# Altium PCB WCH-CH9160-R0-1v0.PcbDoc
Units mil, origin at the board's own origin, x right, y up, seen from the top; angles counter-clockwise.
Board outline 787.4 x 1968.5 mil, 2 copper layers (Top Layer, Bottom Layer); 22 components, 26 nets, 95 pads, 182 vias.
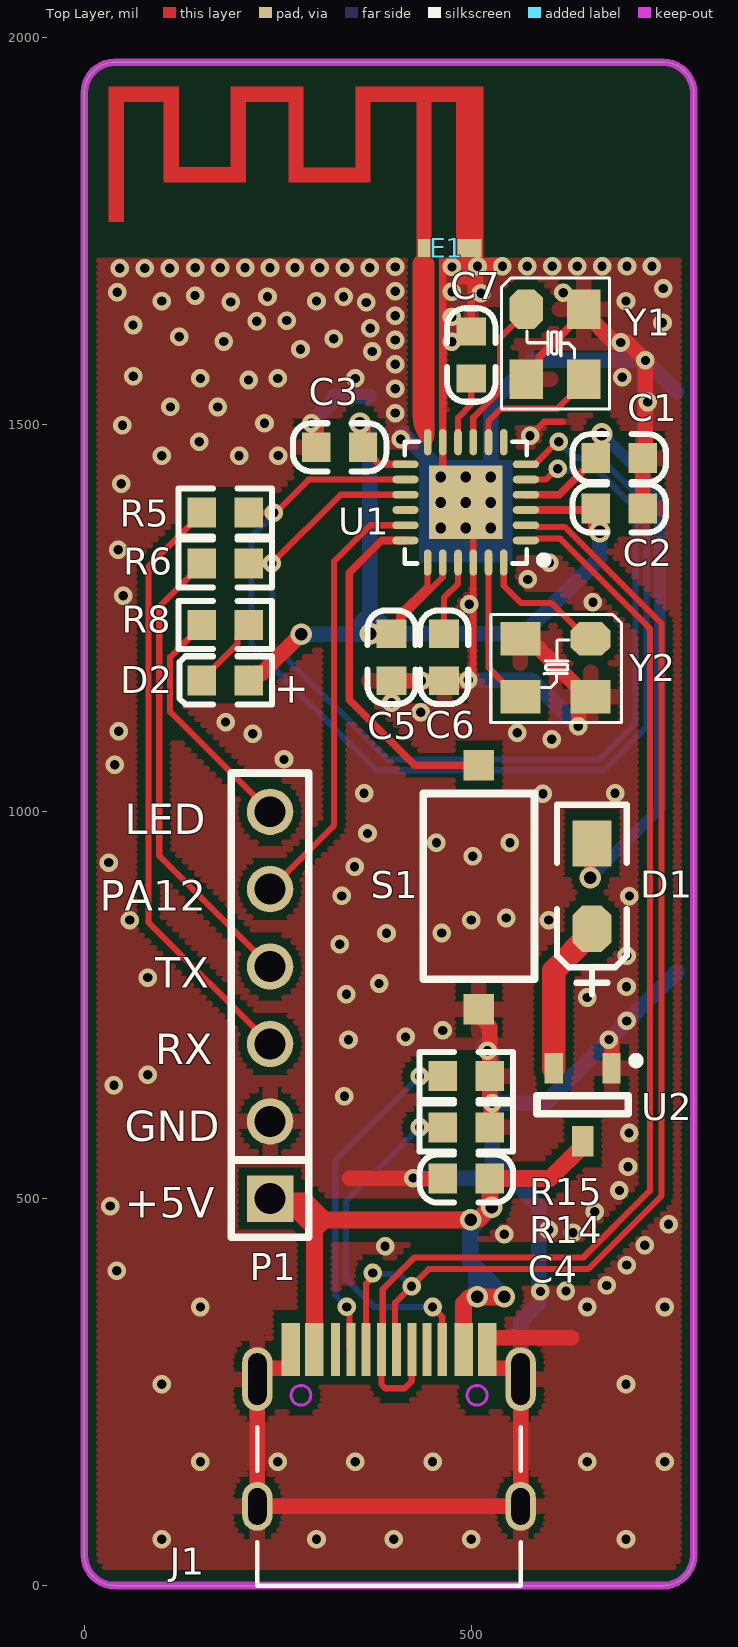
[diagram p0: Top Layer view]
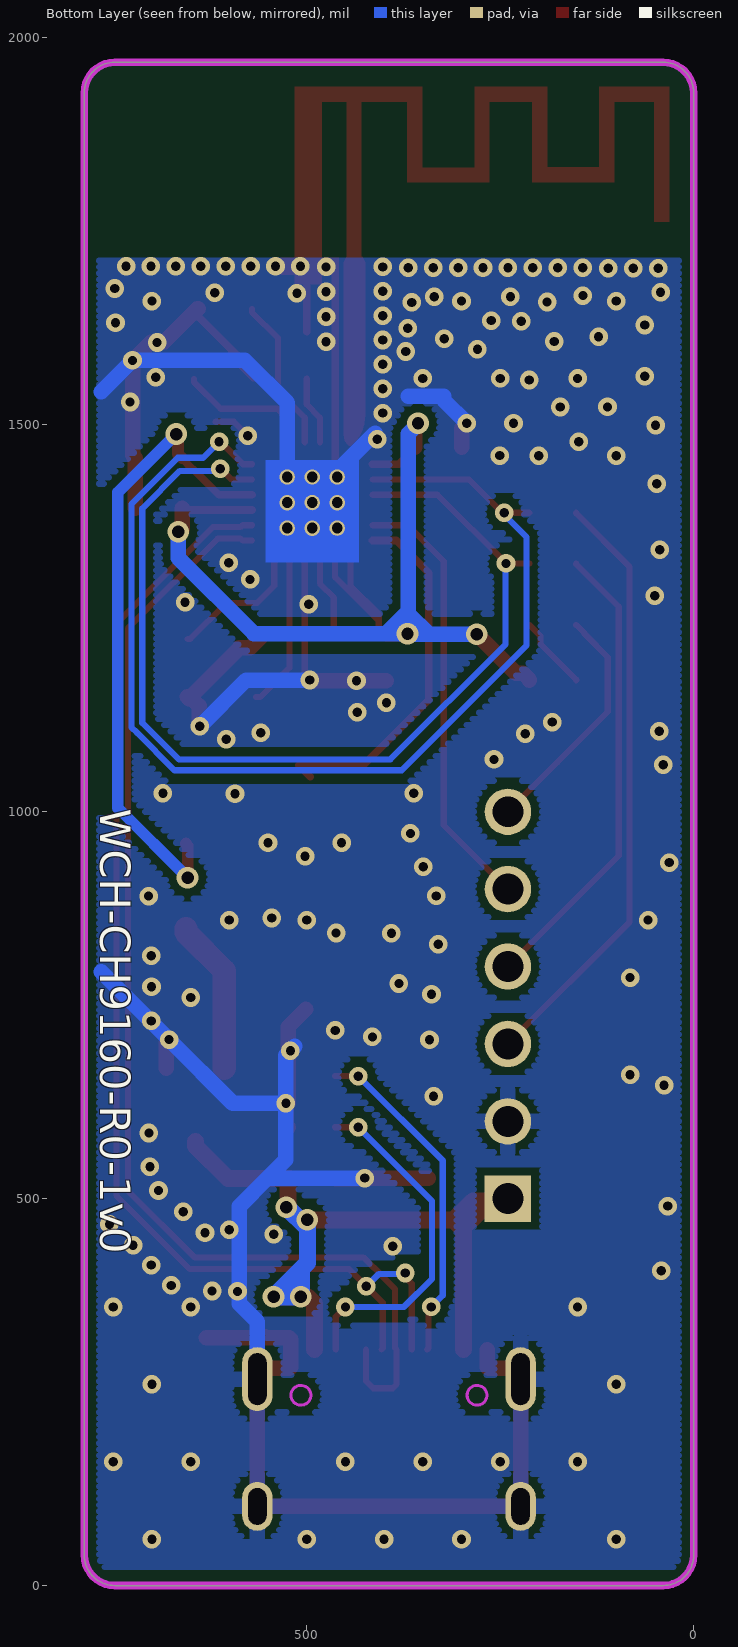
[diagram p1: Bottom Layer view, seen from below]

## Layer stack, top to bottom
Top Solder: solder mask 0.4, Solder Resist, Dk 3.5
Top Layer: signal copper 1.4
Dielectric 1: dielectric 12.6, FR-4, Dk 4.8
Bottom Layer: signal copper 1.4
Bottom Solder: solder mask 0.4, Solder Resist, Dk 3.5

## Board outline
0,39.37 0,1929.13 cw(c39.37,1929.13) 39.37,1968.5 748.03,1968.5 cw(c748.03,1929.13) 787.4,1929.13 787.4,39.37 cw(c748.03,39.37) 748.03,0 39.37,0 cw(c39.37,39.37)

## Design rules (kind name [scope] priority, off if disabled: settings)
Clearance Clearance_2 [InNet('NetE1_1') vs InPolygon] p1: gap=6 ignorepadtopadclearanceinfootprint=FALSE
Clearance Clearance_1 [InPolygon] p2: gap=10 ignorepadtopadclearanceinfootprint=FALSE
Clearance [All] p3: gap=6 ignorepadtopadclearanceinfootprint=FALSE except(8: Arc-Via Track-Via SMDPad-Via THPad-Via Via-Via Via-Fill Via-Poly Via-Region Via-Hole)
ComponentClearance [All] p1 off: gap=10 collisioncheckmode=3 verticalgap=10 showdistances=FALSE
DiffPairsRouting [All] p1: maxlimit=10 minlimit=7 mostfreqgap=8 toplayer_minwidth=6 toplayer_maxwidth=15 toplayer_prefwidth=8 bottomlayer_minwidth=6 bottomlayer_maxwidth=15 bottomlayer_prefwidth=8 maxuncoupledlength=500
MinimumSolderMaskSliver [All] p1 off: minsoldermaskwidth=10
PolygonConnect PolygonConnect_1 [IsVia] p1: connectstyle=Direct reliefconductorwidth=10 reliefentries=4 polygonreliefangle="90 Angle" airgapwidth=10
PolygonConnect [All] p2: connectstyle=Relief reliefconductorwidth=20 reliefentries=4 polygonreliefangle="90 Angle" airgapwidth=10
RoutingVias [All] p1: holewidth=16 width=28 viastyle="Through Hole" minholewidth=12 minwidth=24 maxholewidth=28 maxwidth=50
SilkToSilkClearance [All] p1 off: silktosilkclearance=10
SilkToSolderMaskClearance [IsPad] p1 off: minsilkscreentomaskgap=10 clearancetoexposedcopper=TRUE
SolderMaskExpansion [All] p1: expansion=2 istentingtop=FALSE
Width [All] p1: maxlimit=100 minlimit=6 preferedwidth=10
25 further rules are at their usual default settings.

## Classes and differential pairs
differential pair UD: +UDM -UDP

## Components (designator, comment, footprint, x,y, rotation, side; value= is the part's Value field where it differs from the comment)
C1 "1uF" 0603_C 721.63,1457 r180 top
C2 "1uF" 0603_C 721.63,1392 r180 top
C3 "0.1uF" 0603_C 360.21,1471.03 r180 top
C4 "2.2uF" 0603_C 463.37,526 r0 top value=100pF
C5 "1uF" 0603_C 397,1230 r270 top
C6 "0.1uF" 0603_C 465,1169.37 r90 top
C7 "1uF" 0603_C 500,1620.63 r270 top
D1 "1N4148" 1206+ 656,849 r90 top
D2 "LED" 0603+ 212.31,1169.85 r180 top
E1 "ANTENNA" ANT-F-1-2.4G-1.6mmFR4 439.37,1728.5 r0 top
J1 "TYPE-C-Receptacle-2.0" TYPE-C-Receptacle-2.0 393.7,305 r0 top
P1 "Header 6" SIP6-2.54mm 240,500 r180 top
R5 "(0)" 0603 212.31,1386.53 r180 top
R6 "(0)" 0603 212.31,1320.92 r180 top
R8 "1K" 0603 151.68,1241.47 r0 top
R14 "5.1K (5101) ±1%" 0603 463.37,592.2 r0 top
R15 "5.1K (5101) ±1%" 0603 463.37,658.36 r0 top
S1 "KEY" SMD_6.1x3.65x2.5mm-KEY 510,745 r90 top
U1 "CH9160" QFN24_4X4 492.8,1399.84 r90 top
U2 "CH213K" SOT-23-3 681.4,668.49 r180 top
Y1 "32M" XT3225 570.87,1649.61 r270 top
Y2 "25M" XT3225 654.16,1223.31 r180 top

## Footprints (in the part's own frame and the unit in brackets; to place one, negate y for a bottom-side part, rotate by r counter-clockwise, add the part's x,y. Pads: shape width x height; smd on the part's side, far side on the other; paste and mask are expansions set on the pad)
0603 [mm]
  rect 0.93x0.98 smd: 1(0,0) 2(1.54,0)
  silkscreen extent -0.76,-0.79 2.3,0.79
0603+ [mm]
  rect 0.93x0.98 smd: 1(0,0) 2(1.54,0)
  silkscreen extent -0.76,-0.79 2.27,0.79
0603_C [mm]
  rect 0.93x0.98 smd mask+0.051: 1(0,0) 2(1.54,0)
  silkscreen extent -0.76,-0.79 2.31,0.79
1206+ [mil]
  oct 60x50 smd: 1(0,0)
  rect 60x50 smd: 2(110,0)
  silkscreen extent -85,-45 160,45
ANT-F-1-2.4G-1.6mmFR4 [mm]
  rect 0.8x0.6 smd mask+0: 0(1.483,0)
  rect 0.4x0.6 smd mask+0: 1(0,0)
  Top Layer region: 0.24,5.027 -0.26,5.027 -0.26,-0.304 0.24,-0.304
  Top Layer region: 1.94,5.002 1.04,5.002 1.04,-0.304 1.94,-0.304
  Top Layer region: 1.94,5.296 -2.26,5.296 -2.26,4.796 1.94,4.796
  Top Layer region: -1.76,4.977 -2.26,4.977 -2.26,2.157 -1.76,2.157
  Top Layer region: -1.85,2.651 -4.39,2.651 -4.39,2.156 -1.85,2.156
  Top Layer region: -3.96,4.976 -4.46,4.976 -4.46,2.156 -3.96,2.156
  Top Layer region: -3.96,5.296 -6.36,5.296 -6.36,4.796 -3.96,4.796
  Top Layer region: -5.86,4.977 -6.36,4.977 -6.36,2.157 -5.86,2.157
  Top Layer region: -5.875,2.657 -8.364,2.657 -8.364,2.157 -5.875,2.157
  Top Layer region: -8.06,4.977 -8.56,4.977 -8.56,2.157 -8.06,2.157
  Top Layer region: -8.06,5.296 -10.36,5.296 -10.36,4.796 -8.06,4.796
  Top Layer region: -9.86,4.976 -10.36,4.976 -10.36,0.856 -9.86,0.856
QFN24_4X4 [mm]
  round 0.508 hole 0.356: 0(-0.844,-0.823) 0(-0.844,0.818) 0(-0.005,-0.003) 0(0.833,-0.823) 0(0.833,0.818)
  rect 2.413x2.413 smd mask+0.051: 0(0,0)
  oval 0.25x0.864 smd mask+0.051: 1(-1.25,-1.976) 2(-0.75,-1.976) 3(-0.25,-1.976) 4(0.25,-1.976) 5(0.75,-1.976) 6(1.25,-1.976) 13(1.25,1.976) 14(0.75,1.976) 15(0.25,1.976) 16(-0.25,1.976) 17(-0.75,1.976) 18(-1.25,1.976)
  oval 0.864x0.25 smd mask+0.051: 7(1.976,-1.25) 8(1.976,-0.75) 9(1.976,-0.25) 10(1.976,0.25) 11(1.976,0.75) 12(1.976,1.25) 19(-1.976,1.25) 20(-1.976,0.75) 21(-1.976,0.25) 22(-1.976,-0.25) 23(-1.976,-0.75) 24(-1.976,-1.25)
  silkscreen extent -2.02,-2.69 1.99,2
SIP6-2.54mm [mil]
  rect 60x60 hole 40: 1(0,0)
  round 60 hole 40: 2(0,-100) 3(0,-200) 4(0,-300) 5(0,-400) 6(0,-500)
  silkscreen extent -50,-550 50,50
SMD_6.1x3.65x2.5mm-KEY [mm]
  rect 1x1 smd: 1(0,0) 2(8,0)
  silkscreen extent 0.98,-1.83 7.08,1.83
SOT-23-3 [mm] "SOT-23-3"
  rect 0.6x1 smd: 1(0,0) 2(1.9,0)
  rect 0.7x1 smd: 3(0.95,2.4)
  silkscreen extent -0.93,-0.38 2.45,1.49
TYPE-C-Receptacle-2.0 [mm]
  oval 1x1.6 hole 0.6 slot 1.2 at 90 deg: 0(-4.32,-5.15) 0(4.32,-5.15)
  oval 1x2.1 hole 0.6 slot 1.7 at 90 deg: 0(-4.32,-0.97) 0(4.32,-0.97)
  rect 0.6x1.75 smd mask+0.051: A1(-3.225,0) A4(-2.45,0) B1(3.225,0) B4(2.45,0)
  rect 0.3x1.75 smd mask+0.051: A5(-1.25,0) A6(-0.25,0) A7(0.25,0) A8(1.25,0) B5(1.75,0) B6(0.75,0) B7(-0.75,0) B8(-1.75,0)
  Keep-Out Layer circle w0.1: c2.89,-1.5 r0.325
  Keep-Out Layer circle w0.1: c-2.89,-1.5 r0.325
  silkscreen extent -4.32,-7.75 4.32,-2.55
XT3225 [mm]
  oct 1.3x1.1 smd: 1(0,0)
  rect 1.3x1.1 smd: 2(2.3,0) 3(2.3,1.9) 4(0,1.9)
  silkscreen extent -1.02,-0.8 3.27,2.74

## Part data
C1 C2 C3 C5 C6: library part CAP, "Capacitor"
C4: library part Cap, "Capacitor", LatestRevisionDate=17-Jul-2002, LatestRevisionNote="Re-released for DXP Platform.", PackageReference=RAD-0.3, Published=8-Jun-2000, Publisher="Altium Limited"
C7: library part C0402
D1: library part Diode, "Default Diode", Code_JEDEC=DO-214-AB, LatestRevisionDate=17-Jul-2002, LatestRevisionNote="Re-released for DXP Platform.", PackageDescription="DO-214-AB/SMC; 2 C-Bend Leads; Body 7.9 x 5.9 mm, inc. leads (LxW)", PackageReference=SMC, PackageVersion=Sep-1996, Published=8-Jun-2000, Publisher="Altium Limited"
E1: "Generic Antenna"
J1: "Type-C USB2.0 母座"
P1: "Header, 6-Pin", LatestRevisionDate=17-Jul-2002, LatestRevisionNote="Re-released for DXP Platform.", Publisher="Altium Limited"
R5 R6 R8 R14 R15: library part RES
S1: library part KEY1
U1: "BLE to USB2.0 high speed HID"
U2: "Ideal Diode 5V*1A"
Y1 Y2: library part XTAL, "Crystal Oscillator", LatestRevisionDate=17-Jul-2002, LatestRevisionNote="Re-released for DXP Platform.", PackageDescription="Crystal, Thru-Hole; 2 Leads; Body 3.1 x 8.2 mm (Dia.xH)", PackageReference=R38, Published=8-Jun-2000, Publisher="Altium Limited"

## Via types
v1: diameter 24, hole 12, Top Layer to Bottom Layer, tented both sides, 168 vias
v2: diameter 28, hole 16, Top Layer to Bottom Layer, tented both sides, 10 vias
v3: diameter 20, hole 14, Top Layer to Bottom Layer, tented both sides, 4 vias

## Nets (pads, with @x,y where several pads share a name; then routed paths per layer and width w, separated by ;. In a path a pad name is that pad's centre, name@x,y a point inside that pad or via, vN(x,y) a via of type N, cw(c..) or ccw(c..) an arc to the next point about the centre after c; other vN are vias at no path point)
+5V: C4.2 J1.A4 J1.B4 P1.1 U2.3 | length 1103.5
  Top Layer w22: P1.1 242.83,497.17 P1.1@262.83,497.17 ; P1.1@260,500 P1.1@262.83,497.17 ; J1.A4 297.24,459.55 ; J1.B4 490.16,364.52 498.82,373.19 v2(507.82,373.19) v2@533.84,373.19 ; U2.3 644,568.09 601.91,526 C4.2 524,487.9 510.03,473.93 500.86,473.93 499.86,472.93 v2(499.32,472.93) 498.82,472.43 310.13,472.43 ; P1.1@262.83,497.17 285.4,497.17 301.57,481 ; P1.1@262.83,497.17 279,481 ; 279,481 297.24,462.76 297.24,459.55 ; 279,481 301.57,481 ; 297.24,459.55 310.13,472.43 ; 301.57,481 310.13,472.43
  Bottom Layer w22: v2@498.82,461.27 v2(526.46,488.9) 524.84,488.9 510.01,474.08 500.46,474.08 v2(499.32,472.93) 498.82,472.43 v2@498.82,461.27 ; v2@498.82,461.27 498.82,417.21 507.03,409 ; 507.03,409 v2(542.84,373.19) v2(507.82,373.19) 507.03,373.97 507.03,409
CC1: J1.A5 R15.1 | length 437
  Top Layer w8: v1(339.05,360.13) 342.58,356.6 342.58,306.91 J1.A5 ; v1(433.25,658.36) R15.1
  Bottom Layer w8: v1(339.05,360.13) 324.23,374.95 324.23,549.34 v1(433.25,658.36)
CC2: J1.B5 R14.1 | length 452.5
  Top Layer w8: v1(433.25,592.2) R14.1 ; v1(450,360) 462.6,347.4 J1.B5
  Bottom Layer w8: v1(433.25,592.2) 338.23,497.18 338.23,396.15 374.38,360 v1(450,360)
GND: C1.1 C2.1 C3.2 C4.1 C5.2 C6.1 C7.1 E1.0 J1.0 J1.A1 J1.B1 P1.2 R14.2 R15.2 S1.1 U1.0 U1.11 U1.22 U2.1 Y1.2 Y1.4 Y2.2 Y2.4 | length 4327.2
  Top Layer w8: v1@500.99,1177.14 502.65,1178.8 U1.22 502.65,1381.23 U1.0@504.07,1382.66 ; v1(576.05,1485.92) 594.13,1504 617.97,1504
  Top Layer w10: U1.0@468.66,1417.01 463.28,1422.39 U1.11 463.28,1698.5 469.79,1705.02 v1@482.07,1705.02 ; C7.1 v1@500,1703.11 ; Y1.2@561.27,1561.21 569.09,1561.21 587.52,1579.65 587.52,1587.52 Y1.4@645.67,1645.67
  Top Layer w20: J1.A1 266.73,282.36 264.92,280.55 232.57,280.55 223.62,271.6 223.62,266.81 223.62,102.24 563.78,102.24 563.78,266.81 563.78,271.6 554.83,280.55 522.48,280.55 520.67,282.36 J1.B1 520.67,318.19 522.48,320 551.94,320 ; v1(293.09,1502.13) 299.58,1495.63 C3.2 ; 342.89,526.59 v1(425.17,526.59) 425.76,526 C4.1 ; C5.2 v1(435.71,1169.37) C6.1 495.34,1169.37 v1(496.22,1170.25) ; S1.1@501,745 524,722 R15.2 v1@524,623.3 ; R14.2 526.14,594.34 526.14,622.53 v1(526.91,623.3) ; 553.43,321.49 551.94,320 ; Y2.2@555.18,1229.67 573.19,1211.66 587.07,1211.66 650.22,1148.51 Y2.4 ; 629.83,320 551.94,320 ; v1(638.27,1110.36) 639.04,1111.13 639.04,1136.86 648.29,1146.11 Y2.4@652.2,1146.11 ; Y1.4@640.28,1650.1 641.24,1650.1 645.67,1645.67 684.87,1606.47 v1(693.38,1606.47) 701.89,1606.47 v1(725.11,1583.26) 725.11,1460.48 C1.1 C2.1 ; v1(677.92,705.62) 681.4,702.13 U2.1
  Bottom Layer w20: v1(293.09,1502.13) 323.08,1532.13 ; 323.08,1537.13 368.6,1537.13 ; v1@411.39,1489.34 460.61,1440.13 460.61,1432.63 v3(492.91,1432.63) 525.21,1432.63 525.21,1528.65 579.81,1583.26 v1(725.11,1583.26) 765.79,1542.57 ; v1(425.17,526.59) 550.72,526.59 ; v1(496.22,1170.25) 578.39,1170.25 v1(638.27,1110.36) ; v1@515.19,696.85 v1(521.05,690.99) 526.91,685.13 v1(526.91,623.3) ; J1.0@563.78,266.81 563.78,340.9 587.11,364.22 587.11,490.2 550.72,526.59 ; 765.79,793.49 v1(677.92,705.62) 595.6,623.3 v1(526.91,623.3) ; v1(526.91,623.3) 526.91,550.41 550.72,526.59
  other v1: 100,60 300,60 400,60 500,60 700,60 150,160 250,160 350,160 450,160 650,160 750,160 100,260 700,260 150,360 650,360 750,360 589.44,380.16 622.36,380.71 675.19,387.9 41.98,406.79 700.91,414.18 388.65,438.35 724.41,439.69 542.69,454.01 631.49,455.95 600,460 755.01,467.02 659.6,483.04 33.52,490.49 691.52,510.59 702.61,541.17 703.95,584.86 336.11,632.36 38.22,646.59 82.14,660 341.37,705.2 415.1,709.04 463.05,717.44 701.08,729.67 650,760 338.74,764 700.63,773.81 380.86,778.04 82.14,785.77 701,814 329.96,828.94 390.52,842.99 462.06,843.3 58.87,860 500,860 600,860 545.08,862.72 332.6,891.25 704.4,891.03 349.27,928.99 31.64,934.35 502.12,942.41 455,960 550,960 365.94,971.99 592.66,1023.38 361.56,1023.77 685.84,1023.84 39.32,1060.63 258,1067.65 604.17,1093.57 217.63,1101 559.39,1102.16 44.41,1103.96 182.53,1115.92 434.87,1128.51 397,1141.06 497.29,1268.31 657.25,1270.94 50.15,1279.19 573.19,1300.28 600.69,1321.81 43.78,1338.44 47.6,1423.82 100,1460 200,1460 250.61,1460.34 148.36,1478.15 408.8,1481.43 49.21,1499.4 232.79,1502.16 401.86,1515.28 111.29,1523.19 172.38,1523.08 728.29,1529.57 401.86,1546.75 212.25,1558 150,1560 250,1560 350,1560 695.01,1561.43 63.13,1562.64 401.86,1578.22 371.96,1594.76 279.38,1597.88 180.03,1607.77 475.01,1607.53 401.86,1609.69 322.41,1611.36 122.81,1614.01 369.36,1624.93 63,1629.09 747.16,1631.95 222.68,1633.77 261.69,1634.81 475.01,1639.72 401.86,1641.17 364.16,1658.22 189.39,1658.74 100,1660 300,1660 700,1660 236.72,1665.5 335.03,1665.5 143.1,1667.06 512.64,1670.15 42.71,1671.22 618.93,1670.62 475.01,1671.92 401.86,1672.64 748.27,1676.24 45.89,1702.3 78.08,1702.3 110.28,1702.3 143.39,1703.2 175.58,1703.2 207.77,1703.2 239.97,1703.2 272.16,1703.2 304.36,1703.2 336.55,1703.2 368.75,1703.2 401.86,1704.11 475.01,1704.11 508.12,1705.02 540.32,1705.02 572.51,1705.02 604.71,1705.02 636.9,1705.02 669.09,1705.02 701.29,1705.02 733.48,1705.02
  other v3: 492.91,1366.63 460.61,1399.63 525.21,1399.63
LED: P1.6 R8.1 | length 311.9
  Top Layer w8: R8.1 140.94,1230.73 140.94,1229.74 110.87,1199.67 110.87,1129.13 176.26,1063.74 P1.6
NetC6_2: C6.2 U1.21 | length 99.5
  Top Layer w8: C6.2 465,1276.97 482.96,1294.93 U1.21
NetD1_1: D1.1 U2.2 | length 201
  Top Layer w30: U2.2 606.6,794.6 656,844 D1.1
NetD2_2: D2.2 R8.2 | length 96.7
  Top Layer w8: D2.2 151.68,1170.83 198,1217.16 198,1227.16 R8.2
NetE1_1: E1.1 U1.12 | length 869.3
  Top Layer w9.84: 429.1,1688.1 429.1,1512.64 ccw(c478.58,1512.64) 434.69,1489.78 ; 438.23,1678.31 ccw(c446.75,1669.78) 434.69,1669.78 434.69,1489.78 ; E1.1 cw(c429.18,1718.32) E1.1@443.59,1718.32 ; 443.59,1698.61 U1.12 cw(c478.58,1512.64) 434.69,1489.78
  Top Layer w10: U1.12 ccw(c434.69,1486.54) 447.28,1486.54 447.28,1680.72
  Top Layer w28.1: 438.23,1678.31 438.23,1707.5
NetU1_23: U1.23 Y2.3 | length 194.9
  Top Layer w8: U1.23 522.33,1185.85 542.02,1166.17 559.67,1148.51 Y2.3@565.58,1148.51
NetU1_24: U1.24 Y2.1 | length 170.6
  Top Layer w8: U1.24 542.02,1292.13 564.42,1269.73 603.81,1269.73 650.22,1223.31 Y2.1
PA0: U1.7
PA1: R5.1 U1.6 U1.14 | length 1494.3
  Top Layer w8: R5.1 v1(244.86,1386.53) 247.3,1386.53 290.14,1429.37 U1.14 ; U1.6 582.68,1449.05 582.68,1449.43 611.43,1478.18 v1(613.23,1478.18)
  Bottom Layer w8: v1(244.86,1386.53) 244.86,1384.1 216.04,1355.28 216.04,1214.84 377.23,1053.65 671.01,1053.65 719.26,1101.91 726.46,1109.1 726.46,1397.66 719.26,1404.86 666.71,1457.41 633.99,1457.41 v1(613.23,1478.18)
PA10: S1.2 U1.18 | length 477.6
  Top Layer w9.84: U1.18 384.24,1350.63 342.29,1308.68 342.29,1144.89 427.22,1059.96 S1.2 S1.2@495.24,1045.2
PA12: P1.5 U1.17 | length 569.6
  Top Layer w8: P1.5 322.84,982.84 322.84,1323.83 369.32,1370.31 U1.17
PA13: U1.16
PA14: R6.1 U1.5 U1.15 | length 1340.6
  Top Layer w8: R6.1 v1(242.43,1320.92) 331.19,1409.68 U1.15 ; U1.5 596.6,1429.37 610.43,1443.2 v1(611.7,1443.2)
  Bottom Layer w8: v1(242.43,1320.92) 243.03,1320.32 243.03,1216.46 391.84,1067.65 665.21,1067.65 712.46,1114.9 712.46,1391.86 663.81,1440.51 614.39,1440.51 v1(611.7,1443.2)
RX: P1.3 R5.2 | length 780.1
  Top Layer w8: R5.2 151.68,1385.55 82.87,1316.73 82.87,857.13 P1.3
TX: P1.4 R6.2 | length 602.9
  Top Layer w8: R6.2 151.68,1319.94 96.87,1265.12 96.87,943.13 P1.4
UDM: J1.A7 J1.B7 U1.2 | length 1590.7
  Top Layer w8: J1.B7 364.17,390.05 372.57,398.44 v1(372.57,403.98) ; J1.A7 401.64,306.91 401.64,365.42 445.22,409 651,409 746,504 746,1243.21 621.24,1367.97 585.53,1367.97 583.18,1370.31 U1.2
  Bottom Layer w8: v1(372.57,403.98) 373.81,402.73 406.58,402.73 422.94,386.37 v1(422.94,386.72)
UDP: J1.A6 J1.B6 U1.1 | length 1544.1
  Top Layer w8: J1.B6 423.23,264.3 414.01,255.08 388.75,255.08 383.86,259.97 J1.A6 385.76,306.91 385.76,383.24 398.94,396.41 398.94,396.66 413,410.72 413.24,410.72 426.52,424 644.78,424 731,510.21 731,1237 615.03,1352.97 585.53,1352.97 583.18,1350.63 U1.1
V33: C2.2 C3.1 C5.1 D2.1 U1.3 U1.13 U1.19 U1.20 | length 1381.9
  Top Layer w8: C5.1@407.39,1239.41 397.98,1230 C5.1 406.9,1239.9 C5.1@406.9,1246.67 ; U1.19 443.59,1292.31 406.9,1255.62 C5.1@406.9,1246.67 ; U1.20 463.27,1303.05 C5.1@406.9,1246.67
  Top Layer w9.84: C3.1 360.21,1470.04 381.2,1449.05 U1.13 ; U1.3 659,1390 C2.2
  Top Layer w20: D2.1 212.31,1170.83 220.62,1179.14 229.83,1179.14 v2(280.14,1229.45) ; v2(356.18,1502.13) 356.18,1501.05 360.21,1497.01 C3.1 ; v2(369.78,1230.25) 369.9,1230.13 396.87,1230.13 C5.1 ; C2.2 661,1364.93 v2@665.04,1360.9
  Bottom Layer w20: v2(280.14,1229.45) 342.29,1229.45 ; v2(356.18,1502.13) 356.18,1501.25 369.01,1488.41 369.01,1258.49 ; v2(666.04,1361.9) 666.04,1327.96 568.33,1230.25 397.25,1230.25 ; 342.29,1229.45 369.01,1256.16 ; 342.29,1229.45 368.97,1229.45 v2(369.78,1230.25) ; 369.01,1256.16 369.01,1258.49 ; 369.01,1256.16 369.01,1231.02 v2(369.78,1230.25) ; 369.01,1258.49 397.25,1230.25 ; v2(369.78,1230.25) 397.25,1230.25
VDD4: C1.2 D1.2 U1.4 | length 831.9
  Top Layer w9.84: U1.4 613.68,1409.68 646.63,1442.63 647.61,1442.63 661,1456.02 C1.2
  Top Layer w15: v2(653.97,914.83) 653.97,956.3 656.33,958.67 D1.2 ; C1.2 666.32,1462.32 666.32,1485.62 v2(668.81,1488.1)
  Bottom Layer w15: v2(653.97,914.83) 743.96,1004.82 743.96,1412.95 v2(668.81,1488.1)
VINTA: C7.2 U1.10 | length 89.4
  Top Layer w8: U1.10 482.96,1509.46 500,1526.5 C7.2
X32MI: U1.9 Y1.1 | length 200.2
  Top Layer w8: U1.9 502.65,1509.34 537.01,1543.71 537.01,1611.81 570.87,1645.67 Y1.1
X32MO: U1.8 Y1.3 | length 175.4
  Top Layer w8: U1.8 522.33,1505.01 538.02,1520.7 611.25,1520.7 645.67,1555.12 Y1.3
pads on no net: J1.A8 J1.B8

## Polygon pours and split planes (outlines as drawn)
GND on Top Layer "GND" (hatched Horizontal grid 8 track 8, remove dead copper, pour order 0): 0,1712.54 788.02,1712.54 788.02,0 -1,0 -1,50.2
GND on Bottom Layer "GND" (hatched Horizontal grid 8 track 8, remove dead copper, pour order 1): 0,1712.54 788.02,1712.54 788.02,0 -1,0 -1,50.2

## Keep-outs
Keep-Out Layer:
  the board outline again, w10

## Other copper
Top Layer:
  rectangle net GND: 480.3,1681.22 515.74,1728.5
  rectangle net GND: 458.28,1693.5 534.11,1716.54
Bottom Layer:
  rectangle net GND: 432.72,1321.85 553.27,1454.45
Multi-Layer:
  pour cut-out: 787.39,1712.54 0,1712.54 0,1968.5 787.4,1968.5

## Silkscreen, mask and mechanical layers (free items; w line width, h text height)
Top Overlay:
  text "LED" at 52.42,971.11 h39.37
  text "PA12" at 19.63,871.96 h39.37
  text "TX" at 91.78,772.8 h39.37
  text "RX" at 91.78,673.64 h39.37
  text "GND" at 52.42,574.48 h39.37
  text "+5V" at 52.42,475.33 h39.37
Bottom Overlay:
  text "WCH-CH9160-R0-1v0" at 766.6,1004.19 h39.37 r90
Mechanical 1:
  the board outline again, w10

## Text inside footprints (layer, text, board x,y; h text height)
D2: Top Overlay "+" at 250.39,1180.84 h40 r270